# Altium PCB MCS17.PcbDoc (part 2 of 3)
Units mil, origin at the board's own origin, x right, y up, seen from the top; angles counter-clockwise.
Board outline 8500 x 5400 mil, 2 copper layers (Top Layer, Bottom Layer), stack 81.54 mil thick; 114 components, 70 nets, 364 pads, 106 vias.
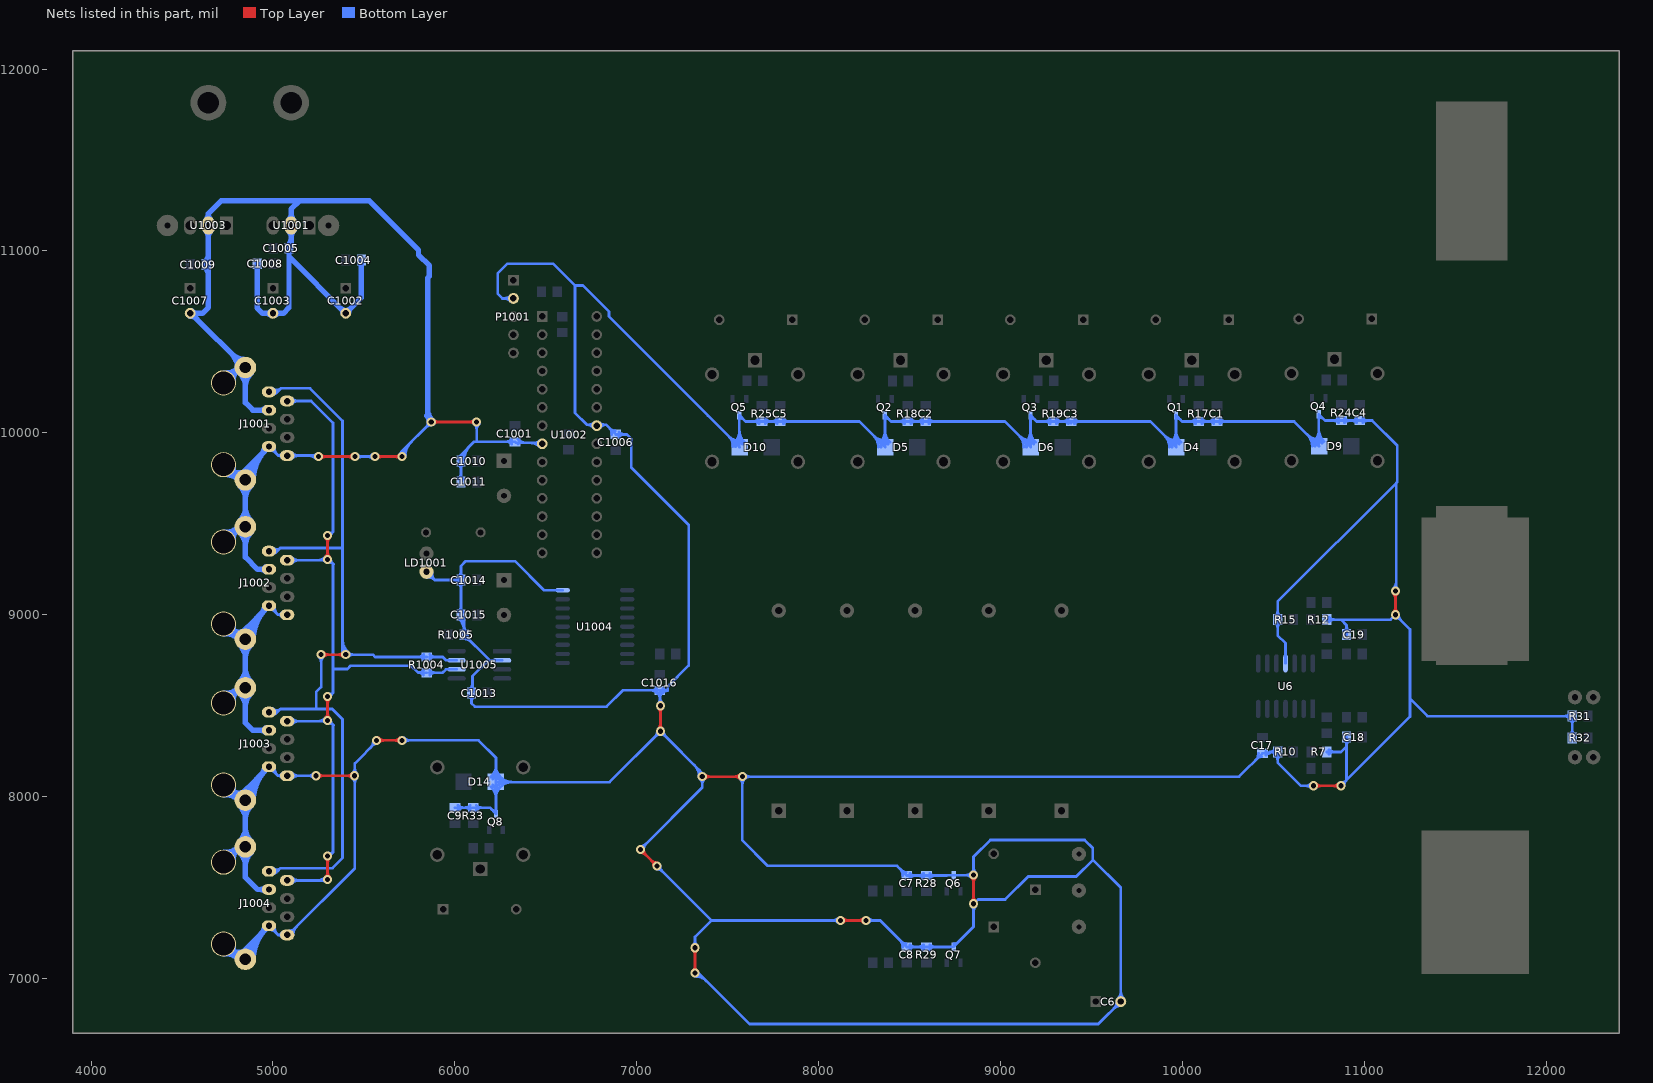
[diagram p2: the nets of this part, all layers, seen from the top]

## Via types
v1: diameter 50, hole 28, Top Layer to Bottom Layer, 85 vias
v2: diameter 196.85, hole 118.11, Top Layer to Bottom Layer, 12 vias
v3: diameter 157.48, hole 157.48, Top Layer to Bottom Layer, 7 vias
v4: diameter 137.8, hole 137.8, Top Layer to Bottom Layer, 2 vias

## Nets (pads, with @x,y where several pads share a name; then routed paths per layer and width w, separated by ;. In a path a pad name is that pad's centre, name@x,y a point inside that pad or via, vN(x,y) a via of type N, cw(c..) or ccw(c..) an arc to the next point about the centre after c; other vN are vias at no path point) (continued)
CAN_GND: C1.1 C2.1 C3.1 C4.1 C5.1 C6.2 C7.1 C8.1 C9.1 C17.1 C18.1 C19.1 C1001.2 C1002.2 C1003.2 C1004.1 C1005.1 C1006.1 C1007.2 C1008.1 C1009.1 C1010.1 C1011.1 C1013.2 C1014.1 C1015.1 C1016.2 D4.1 D5.1 D6.1 D9.1 D10.1 D14.1 J1001.3 J1001.7 J1001.8 J1001.S J1002.3 J1002.7 J1002.8 J1002.S J1003.3 J1003.7 J1003.8 J1003.S J1004.3 J1004.7 J1004.8 J1004.S LD1001.2 P1001.2 Q1.3 Q2.3 Q3.3 Q4.3 Q5.3 Q6.3 Q7.3 Q8.3 R7.2 R10.2 R12.2 R15.2 R17.1 R18.1 R19.1 R24.1 R25.1 R28.1 R29.1 R31.1 R32.1 R33.1 R1005.2 U6.11 U1001.2 U1002.8 U1002.22 U1003.2 U1004.9 U1005.2 | length 67693.4
  Top Layer w15: v1(5236.57,8115) v1(5449,8115) ; v1@5248.95,8102.63 cw(c5278.82,8072.75) 5278.82,8115 cw(c5278.82,8157.25) v1@5248.95,8127.37 ; v1(5250,9870) v1(5450,9870) ; v1@5262.37,9857.63 cw(c5292.25,9827.75) 5292.25,9870 cw(c5292.25,9912.25) v1@5262.37,9882.37 ; v1@5436.63,8102.63 ccw(c5406.75,8072.75) 5406.75,8115 ccw(c5406.75,8157.25) v1@5436.63,8127.37 ; v1@5437.63,9857.63 ccw(c5407.75,9827.75) 5407.75,9870 ccw(c5407.75,9912.25) v1@5437.63,9882.37 ; v1(5560,9870) v1(5710,9870) ; v1(5570,8310) v1(5710,8310) ; v1@5572.37,9857.63 cw(c5602.25,9827.75) 5602.25,9870 cw(c5602.25,9912.25) v1@5572.37,9882.37 ; v1@5582.37,8297.63 cw(c5612.25,8267.75) 5612.25,8310 cw(c5612.25,8352.25) v1@5582.37,8322.37 ; v1@5697.63,8297.63 ccw(c5667.75,8267.75) 5667.75,8310 ccw(c5667.75,8352.25) v1@5697.63,8322.37 ; v1@5697.63,9857.63 ccw(c5667.75,9827.75) 5667.75,9870 ccw(c5667.75,9912.25) v1@5697.63,9882.37 ; v1(5870,10060) v1(6120,10060) ; v1@5882.37,10047.63 cw(c5912.25,10017.75) 5912.25,10060 cw(c5912.25,10102.25) v1@5882.37,10072.37 ; v1@6107.63,10047.63 ccw(c6077.75,10017.75) 6077.75,10060 ccw(c6077.75,10102.25) v1@6107.63,10072.37 ; v1@7020,7692.5 cw(c7020,7650.25) 7049.87,7680.13 cw(c7079.75,7710) v1@7037.5,7710 ; v1(7020,7710) v1(7110,7620) ; v1@7092.5,7620 ccw(c7050.25,7620) 7080.13,7649.87 ccw(c7110,7679.75) v1@7110,7637.5 ; v1@7117.63,8372.37 ccw(c7087.75,8402.25) 7130,8402.25 ccw(c7172.25,8402.25) v1@7142.37,8372.37 ; v1@7117.63,8487.63 cw(c7087.75,8457.75) 7130,8457.75 cw(c7172.25,8457.75) v1@7142.37,8487.63 ; v1(7130,8360) v1(7130,8500) ; v1@7307.63,7042.37 ccw(c7277.75,7072.25) 7320,7072.25 ccw(c7362.25,7072.25) v1@7332.37,7042.37 ; v1@7307.63,7157.63 cw(c7277.75,7127.75) 7320,7127.75 cw(c7362.25,7127.75) v1@7332.37,7157.63 ; v1(7320,7030) v1(7320,7170) ; v1(7360,8110) v1(7580,8110) ; v1@7372.37,8097.63 cw(c7402.25,8067.75) 7402.25,8110 cw(c7402.25,8152.25) v1@7372.37,8122.37 ; v1@7567.63,8097.63 ccw(c7537.75,8067.75) 7537.75,8110 ccw(c7537.75,8152.25) v1@7567.63,8122.37 ; v1(8120,7320) v1(8260,7320) ; v1@8132.37,7307.63 cw(c8162.25,7277.75) 8162.25,7320 cw(c8162.25,7362.25) v1@8132.37,7332.37 ; v1@8247.63,7307.63 ccw(c8217.75,7277.75) 8217.75,7320 ccw(c8217.75,7362.25) v1@8247.63,7332.37 ; v1@8839.04,7423.79 ccw(c8809.17,7453.67) 8851.42,7453.67 ccw(c8893.67,7453.67) v1@8863.79,7423.79 ; v1@8839.04,7556.21 cw(c8809.17,7526.33) 8851.42,7526.33 cw(c8893.67,7526.33) v1@8863.79,7556.21 ; v1(8851.42,7411.42) v1(8851.42,7568.58) ; v1(10720,8060) v1(10870,8060) ; v1@10732.37,8047.63 cw(c10762.25,8017.75) 10762.25,8060 cw(c10762.25,8102.25) v1@10732.37,8072.37 ; v1@10857.63,8047.63 ccw(c10827.75,8017.75) 10827.75,8060 ccw(c10827.75,8102.25) v1@10857.63,8072.37 ; v1@11157.63,9012.37 ccw(c11127.75,9042.25) 11170,9042.25 ccw(c11212.25,9042.25) v1@11182.37,9012.37 ; v1@11157.63,9117.63 cw(c11127.75,9087.75) 11170,9087.75 cw(c11212.25,9087.75) v1@11182.37,9117.63 ; v1(11170,9000) v1(11170,9130)
  Bottom Layer w15: J1004.7@4978.43,7290 5028.43,7240 ; J1003.7@4978.43,8165 5028.43,8115 ; J1002.7@4978.43,9050 5028.43,9000 ; J1001.7@4978.43,9925 5028.43,9875 ; J1004.7@4988.27,7267.97 cw(c4988.27,7238.56) 5009.07,7259.36 ; J1003.7@4988.27,8142.97 cw(c4988.27,8113.56) 5009.07,8134.36 ; J1002.7@4988.27,9027.97 cw(c4988.27,8998.56) 5009.07,9019.36 ; J1001.7@4988.27,9902.97 cw(c4988.27,9873.56) 5009.07,9894.36 ; J1004.7@5010.02,7286.52 ccw(c5057.51,7278.93) 5023.5,7244.92 ; J1003.7@5010.02,8161.52 ccw(c5057.51,8153.93) 5023.5,8119.92 ; J1002.7@5010.02,9046.52 ccw(c5057.51,9038.93) 5023.5,9004.92 ; J1001.7@5010.02,9921.52 ccw(c5057.51,9913.93) 5023.5,9879.92 ; J1004.8@5050.01,7228.16 ccw(c5028.43,7214.41) 5028.43,7240 ; J1004.8@5050.01,7251.84 cw(c5028.43,7265.59) 5028.43,7240 ; J1003.8@5050.01,8103.16 ccw(c5028.43,8089.41) 5028.43,8115 ; J1003.8@5050.01,8126.84 cw(c5028.43,8140.59) 5028.43,8115 ; J1002.8@5050.01,8988.16 ccw(c5028.43,8974.41) 5028.43,9000 ; J1002.8@5050.01,9011.84 cw(c5028.43,9025.59) 5028.43,9000 ; J1001.8@5050.01,9863.16 ccw(c5028.43,9849.41) 5028.43,9875 ; J1001.8@5050.01,9886.84 cw(c5028.43,9900.59) 5028.43,9875 ; J1002.8@5078.43,9000 5028.43,9000 ; J1004.8@5088.27,7262.03 ccw(c5088.27,7303.43) 5117.54,7274.15 ; J1003.8@5103.84,8099.42 cw(c5141.45,8061.82) 5141.45,8115 cw(c5141.45,8168.18) J1003.8@5103.84,8130.58 ; J1001.8@5103.84,9859.42 cw(c5141.45,9821.82) 5141.45,9875 cw(c5141.45,9928.18) J1001.8@5103.84,9890.58 ; J1004.8@5110.3,7240 cw(c5175.25,7240) 5129.32,7285.93 ; 5195.68,9875 cw(c5195.68,9815.68) v1@5237.63,9857.63 ; 5219.82,9875 ccw(c5219.82,9900.18) v1@5237.63,9882.37 ; v1@5224.2,8102.63 ccw(c5194.33,8072.75) 5194.33,8115 ccw(c5194.33,8157.25) v1@5224.2,8127.37 ; v1@5240.57,8115 v1(5236.57,8115) J1003.8@5078.43,8115 5028.43,8115 ; v1(5250,9870) 5245,9875 J1001.8@5078.43,9875 5028.43,9875 ; v1@5436.63,8102.63 cw(c5404.34,8070.34) 5450,8070.34 ; v1@5436.63,8127.37 ccw(c5404.34,8159.66) 5450,8159.66 ; v1(5449,8115) v1@5450,8118.43 ; 5450,8075.17 cw(c5488.83,8075.17) v1@5461.37,8102.63 ; 5450,8154.83 ccw(c5488.83,8154.83) v1@5461.37,8127.37 ; v1(5450,9870) v1(5560,9870) ; v1@5462.37,9857.63 cw(c5492.25,9827.75) 5492.25,9870 cw(c5492.25,9912.25) v1@5462.37,9882.37 ; 5534.82,8267.32 ccw(c5492.14,8310) v1@5552.5,8310 ; v1@5547.63,9857.63 ccw(c5517.75,9827.75) 5517.75,9870 ccw(c5517.75,9912.25) v1@5547.63,9882.37 ; 5552.93,8285.43 cw(c5570,8268.36) v1@5570,8292.5 ; v1(5570,8310) 5570,8302.5 5450,8182.5 v1@5450,8118.43 ; v1@5697.5,9870 cw(c5739.75,9870) 5709.87,9899.87 ; v1@5701.39,9885.23 ccw(c5693.04,9900) 5710,9900 ; v1(5710,8310) 6130,8310 6226,8214 6226,8081.31 D14.1@6226,8079.89 ; v1(5710,9870) 5710,9900 ; v1@5712.5,9870 cw(c5790.96,9870) 5735.48,9925.48 ; v1@5718.61,9885.23 cw(c5726.96,9900) 5710,9900 ; v1@5722.37,8297.63 cw(c5752.25,8267.75) 5752.25,8310 cw(c5752.25,8352.25) v1@5722.37,8322.37 ; v1@5727.5,9870 cw(c5842.18,9870) 5761.09,9951.09 ; LD1001.2@5844,9237 5889.94,9191.06 ; LD1001.2@5848.03,9205.39 cw(c5854.39,9155.52) 5889.93,9191.07 ; v1@5852.5,10060 cw(c5810.25,10060) 5840.13,10030.13 cw(c5870,10000.25) v1@5870,10042.5 ; v1(5870,10060) 5710,9900 ; LD1001.2@5875.61,9232.97 ccw(c5925.48,9226.61) 5889.93,9191.07 ; C9.1@6001,7939.61 R33.1@6101,7939.61 6191.98,7939.61 Q8.3@6226,7905.6 D14.1@6226,8079.89 ; C9.1@6017.73,7926.82 cw(c6048.61,7895.94) 6048.61,7939.61 cw(c6048.61,7983.29) C9.1@6017.73,7952.41 ; C1015.1@6020.59,8982.21 cw(c5945.7,8907.32) R1005.2@6051.61,8907.32 ; C1015.1@6020.59,9015.67 ccw(c5989.71,9046.55) 6033.39,9046.55 ccw(c6077.06,9046.55) C1015.1@6046.18,9015.67 ; C1014.1@6020.59,9174.33 cw(c5989.71,9143.45) 6033.39,9143.45 cw(c6077.06,9143.45) C1014.1@6046.18,9174.33 ; C1014.1@6020.59,9178.27 ccw(c5989.71,9147.39) 5989.71,9191.06 ccw(c5989.71,9234.74) C1014.1@6020.59,9203.85 ; C1014.1@6020.59,9207.79 ccw(c5989.71,9238.67) 6033.39,9238.67 ccw(c6077.06,9238.67) C1014.1@6046.18,9207.79 ; C1011.1@6020.59,9746.73 ccw(c5989.71,9777.61) 6033.39,9777.61 ccw(c6077.06,9777.61) C1011.1@6046.18,9746.73 ; C1010.1@6020.59,9828.27 cw(c5989.71,9797.39) 6033.39,9797.39 cw(c6077.06,9797.39) C1010.1@6046.18,9828.27 ; C1010.1@6021.48,9848.94 cw(c6063.82,9848.94) 6033.88,9878.88 ; C1015.1@6031.2,8992.81 cw(c5981.92,8943.53) 6051.61,8943.53 ; C1011.1@6033.39,9730 C1010.1@6033.39,9845 6033.39,9878.39 6106.69,9951.69 6120,9951.69 ; C1010.1@6036.48,9848.94 cw(c6115.03,9848.94) 6059.49,9904.49 ; R1005.2@6038.82,8906.73 ccw(c6007.94,8937.61) 6051.61,8937.61 ccw(c6095.29,8937.61) R1005.2@6064.41,8906.73 ; C1010.1@6051.48,9848.94 cw(c6166.25,9848.94) 6085.09,9930.09 ; R1005.2@6051.61,8867.97 cw(c6051.61,8814.79) 6089.22,8852.4 ; R1005.2@6069.7,8886.06 ccw(c6103.87,8886.06) 6079.71,8861.9 ; C1013.2@6078.9,8553.27 cw(c6048.02,8522.39) 6091.69,8522.39 cw(c6135.37,8522.39) C1013.2@6104.48,8553.27 ; C1013.2@6078.9,8586.73 ccw(c6034,8631.63) 6097.5,8631.63 ; R33.1@6084.27,7926.82 ccw(c6053.39,7895.94) 6053.39,7939.61 ccw(c6053.39,7983.29) R33.1@6084.27,7952.41 ; C1013.2@6091.69,8570 6091.69,8513.31 6110,8495 6833.64,8495 6923.64,8585 C1016.2@7126.69,8585 ; C1013.2@6097.5,8575.81 6097.5,8662.5 6185,8750 ; 6097.5,8603.59 ccw(c6121.35,8603.59) C1013.2@6104.48,8586.73 ; v1@6107.63,10047.63 cw(c6077.75,10017.75) 6120,10017.75 cw(c6162.25,10017.75) v1@6132.37,10047.63 ; R33.1@6117.73,7926.82 cw(c6148.61,7895.94) 6148.61,7939.61 cw(c6148.61,7983.29) R33.1@6117.73,7952.41 ; v1(6120,10060) 6120,9951.69 ; D14.1@6197.87,8054.6 cw(c6129.96,7986.69) 6226,7986.69 ; D14.1@6197.87,8108.02 ccw(c6129.96,8175.93) 6226,8175.93 ; 6200.16,7931.44 ccw(c6226,7957.28) Q8.3@6226,7920.74 ; D14.1@6208.48,8065.2 cw(c6166.18,8022.9) 6226,8022.9 ; D14.1@6208.48,8097.41 ccw(c6166.18,8139.71) 6226,8139.71 ; 6226,7993.53 cw(c6312.36,7993.53) 6251.29,8054.6 cw(c6312.36,7993.53) 6312.36,8079.89 ; 6226,8029.74 cw(c6276.15,8029.74) 6240.69,8065.2 cw(c6276.15,8029.74) 6276.15,8079.89 ; 6226,8132.87 ccw(c6276.15,8132.87) 6240.69,8097.41 ccw(c6282.99,8139.71) 6282.99,8079.89 ; 6226,8169.08 ccw(c6312.36,8169.08) 6251.29,8108.02 ccw(c6319.2,8175.93) 6319.2,8079.89 ; U1005.2@6260,8750 6185,8750 ; P1001.2@6306.42,10723.42 ccw(c6268.82,10685.82) 6268.82,10739 ccw(c6268.82,10792.18) P1001.2@6306.42,10754.58 ; C1001.2@6313.27,9938.9 ccw(c6282.39,9908.02) 6282.39,9951.69 ccw(c6282.39,9995.37) C1001.2@6313.27,9964.48 ; P1001.2@6322,10739 6261,10739 6235,10765 6235,10876.8 6288.2,10930 6540,10930 6660,10810 ; C1001.2@6346.73,9938.9 cw(c6361.45,9924.18) 6361.45,9945 ; C1001.2@6346.73,9964.48 ccw(c6393.77,10011.53) 6393.77,9945 ; 6414.75,9945 cw(c6414.75,9874.75) U1002.8@6464.42,9924.42 ; 6438.89,9945 ccw(c6438.89,9981.11) U1002.8@6464.42,9955.58 ; U1002.8@6470,9945 6336.69,9945 C1001.2@6330,9951.69 6120,9951.69 ; U1004.9@6592.83,9135 6490,9135 6330,9295 6060,9295 6033.39,9268.39 C1014.1@6033.39,9191.06 ; 6738.89,10045 ccw(c6738.89,10081.11) U1002.22@6764.42,10055.58 ; U1002.22@6762.56,10026.54 ccw(c6725,9997.56) 6725,10045 ; U1002.22@6795.58,10055.58 ccw(c6821.11,10081.11) 6821.11,10045 ; U1002.22@6798.11,10027.45 cw(c6831.61,10004.23) 6831.61,10045 ; 6847.4,10029.22 cw(c6809.79,9991.61) C1006.1@6862.97,9991.61 ; 6856.9,10019.71 ccw(c6881.06,10043.87) C1006.1@6881.06,10009.7 ; C1006.1@6901.73,9978.82 cw(c6932.61,9947.94) 6932.61,9991.61 cw(c6932.61,10035.29) C1006.1@6901.73,10004.41 ; v1(7020,7710) 7360,8050 v1(7360,8110) 7370,8120 v1(7130,8360) 6849.89,8079.89 D14.1@6226,8079.89 ; v1@7020,7727.5 ccw(c7020,7769.75) 7049.87,7739.87 ccw(c7079.75,7710) v1@7037.5,7710 ; 7075.18,8585 cw(c7075.18,8535.81) C1016.2@7109.96,8570.59 ; 7082.98,8585 ccw(c7082.98,8623.16) C1016.2@7109.96,8596.18 ; v1@7110,7602.5 cw(c7110,7560.25) 7139.87,7590.13 cw(c7169.75,7620) v1@7127.5,7620 ; v1(7110,7620) 7410,7320 ; v1@7112.5,8360 cw(c7070.25,8360) 7100.13,8330.13 cw(c7130,8300.25) 7130,8342.5 cw(c7130,8300.25) 7159.87,8330.13 cw(c7189.75,8360) v1@7147.5,8360 ; C1016.2@7113.9,8570.59 cw(c7083.02,8539.71) 7126.69,8539.71 cw(c7170.37,8539.71) C1016.2@7139.48,8570.59 ; v1@7117.63,8512.37 ccw(c7095.74,8534.26) 7126.69,8534.26 ; 7126.69,8550.23 ccw(c7180.23,8550.23) v1@7142.37,8512.37 ; v1(7130,8500) 7130,8489.11 7126.69,8485.81 7126.69,8500 C1016.2@7126.69,8583.39 7170,8583.39 ; C1016.2@7144.36,8571.6 cw(c7170,8549.6) 7170,8583.39 ; C1016.2@7144.36,8595.17 ccw(c7170,8617.18) 7170,8583.39 ; v1@7307.63,7182.37 ccw(c7277.75,7212.25) 7320,7212.25 ccw(c7362.25,7212.25) v1@7332.37,7182.37 ; 7315.98,8174.02 cw(c7251.97,8110) v1@7342.5,8110 ; v1@7320,7012.5 cw(c7320,6921.97) 7384.02,6985.98 ; v1@7320,7027.5 cw(c7320,6973.18) 7358.41,7011.59 ; v1(7320,7030) 7330,7040 7620,6750 9536.59,6750 C6.2@9660.59,6874 9660.59,7499.44 9506.87,7653.16 ; v1(7320,7170) 7320,7230 7410,7320 ; 7341.59,8148.41 cw(c7303.18,8110) v1@7357.5,8110 ; v1@7347.63,8097.63 cw(c7317.75,8067.75) 7360,8067.75 cw(c7402.25,8067.75) v1@7372.37,8097.63 ; D10.1@7527.68,9925.63 ccw(c7466.33,9932.78) 7510,9976.45 ; D10.1@7538.49,9947.97 ccw(c7477.42,10009.04) 7563.78,10009.04 ; D10.1@7542.57,9923.9 ccw(c7505.59,9928.21) 7531.92,9954.54 ccw(c7558.25,9980.87) D10.1@7562.56,9943.88 ; D10.1@7549.09,9937.36 ccw(c7513.63,9972.82) 7563.78,9972.82 ; D10.1@7560.82,9958.78 cw(c7553.67,10020.12) 7510,9976.45 ; 7563.78,9979.67 ccw(c7623.6,9979.67) D10.1@7581.3,9937.36 ; 7563.78,10015.88 ccw(c7659.82,10015.88) D10.1@7591.91,9947.97 ; Q5.3@7563.78,10081.83 cw(c7563.78,10045.28) 7589.62,10071.13 ; D10.1@7565.2,9921.26 D10.1@7563.78,9922.68 ; v1@7567.63,8097.63 cw(c7537.75,8067.75) 7580,8067.75 cw(c7622.25,8067.75) 7592.37,8097.63 cw(c7622.25,8067.75) 7622.25,8110 cw(c7622.25,8152.25) v1@7592.37,8122.37 ; R25.1@7672.05,10050.16 ccw(c7641.17,10019.28) 7641.17,10062.95 ccw(c7641.17,10106.63) R25.1@7672.05,10075.74 ; R25.1@7705.51,10050.16 cw(c7736.39,10019.28) 7736.39,10062.95 cw(c7736.39,10106.63) R25.1@7705.51,10075.74 ; C5.1@7772.05,10050.16 ccw(c7741.17,10019.28) 7741.17,10062.95 ccw(c7741.17,10106.63) C5.1@7772.05,10075.74 ; C5.1@7805.51,10050.16 cw(c7836.39,10019.28) 7836.39,10062.95 cw(c7836.39,10106.63) C5.1@7805.51,10075.74 ; v1@8107.63,7307.63 ccw(c8077.75,7277.75) 8077.75,7320 ccw(c8077.75,7362.25) v1@8107.63,7332.37 ; v1(8120,7320) 7410,7320 ; v1(8260,7320) 8338.2,7320 C8.1@8484,7174.2 R29.1@8593,7174.2 8720.91,7174.2 8722,7175.29 Q7.3@8741.6,7175.29 8851.42,7285.11 v1(8851.42,7411.42) 8875,7435 9025.12,7435 9151.99,7561.87 9415.58,7561.87 9506.87,7653.16 ; v1@8272.37,7307.63 cw(c8302.25,7277.75) 8302.25,7320 cw(c8302.25,7362.25) v1@8272.37,7332.37 ; D5.1@8327.42,9921.26 ccw(c8236.22,9921.26) 8300.71,9985.75 ccw(c8365.2,10050.23) D5.1@8365.2,9959.04 ; D5.1@8338.49,9947.97 ccw(c8277.42,10009.04) 8363.78,10009.04 ; D5.1@8342.42,9921.26 ccw(c8287.44,9921.26) 8326.32,9960.14 ccw(c8365.2,9999.02) D5.1@8365.2,9944.04 ; D5.1@8349.09,9937.36 ccw(c8313.63,9972.82) 8363.78,9972.82 ; 8363.78,9979.67 ccw(c8423.6,9979.67) D5.1@8381.3,9937.36 ; 8363.78,10015.88 ccw(c8459.82,10015.88) D5.1@8391.91,9947.97 ; Q2.3@8363.78,10081.83 cw(c8363.78,10045.28) 8389.62,10071.13 ; D5.1@8365.2,9921.26 D5.1@8363.78,9922.68 ; 8446.4,7211.81 cw(c8408.79,7174.2) C8.1@8461.97,7174.2 ; 8446.4,7604.36 cw(c8408.79,7566.76) C7.1@8461.97,7566.76 ; 8455.9,7202.3 ccw(c8480.06,7226.46) C8.1@8480.06,7192.3 ; 8455.9,7594.85 ccw(c8480.06,7619.02) C7.1@8480.06,7584.85 ; R18.1@8472.05,10050.16 ccw(c8441.17,10019.28) 8441.17,10062.95 ccw(c8441.17,10106.63) R18.1@8472.05,10075.74 ; C8.1@8500.73,7161.41 cw(c8531.61,7130.53) 8531.61,7174.2 cw(c8531.61,7217.88) C8.1@8500.73,7187 ; C7.1@8500.73,7553.96 cw(c8531.61,7523.08) 8531.61,7566.76 cw(c8531.61,7610.43) C7.1@8500.73,7579.55 ; R18.1@8505.51,10050.16 cw(c8536.39,10019.28) 8536.39,10062.95 cw(c8536.39,10106.63) R18.1@8505.51,10075.74 ; C2.1@8572.05,10050.16 ccw(c8541.17,10019.28) 8541.17,10062.95 ccw(c8541.17,10106.63) C2.1@8572.05,10075.74 ; R29.1@8576.27,7161.41 ccw(c8545.39,7130.53) 8545.39,7174.2 ccw(c8545.39,7217.88) R29.1@8576.27,7187 ; R28.1@8576.27,7553.96 ccw(c8545.39,7523.08) 8545.39,7566.76 ccw(c8545.39,7610.43) R28.1@8576.27,7579.55 ; C2.1@8605.51,10050.16 cw(c8636.39,10019.28) 8636.39,10062.95 cw(c8636.39,10106.63) C2.1@8605.51,10075.74 ; R29.1@8609.73,7161.41 cw(c8640.61,7130.53) 8640.61,7174.2 cw(c8640.61,7217.88) R29.1@8609.73,7187 ; R28.1@8609.73,7553.96 cw(c8640.61,7523.08) 8640.61,7566.76 cw(c8640.61,7610.43) R28.1@8609.73,7579.55 ; Q7.3@8741.6,7190.43 ccw(c8741.6,7226.98) 8767.44,7201.13 ; v1@8839.04,7399.04 cw(c8809.17,7369.17) 8851.42,7369.17 cw(c8893.67,7369.17) v1@8863.79,7399.04 ; v1@8839.04,7556.21 ccw(c8809.17,7526.33) 8809.17,7568.58 ccw(c8809.17,7610.83) 8839.04,7580.96 ccw(c8809.17,7610.83) 8851.42,7610.83 ccw(c8893.67,7610.83) v1@8863.79,7580.96 ; D6.1@9127.42,9921.26 ccw(c9036.22,9921.26) 9100.71,9985.75 ccw(c9165.2,10050.23) D6.1@9165.2,9959.04 ; D6.1@9138.49,9947.97 ccw(c9077.42,10009.04) 9163.78,10009.04 ; D6.1@9142.42,9921.26 ccw(c9087.44,9921.26) 9126.32,9960.14 ccw(c9165.2,9999.02) D6.1@9165.2,9944.04 ; D6.1@9149.09,9937.36 ccw(c9113.63,9972.82) 9163.78,9972.82 ; 9163.78,9979.67 ccw(c9223.6,9979.67) D6.1@9181.3,9937.36 ; 9163.78,10015.88 ccw(c9259.82,10015.88) D6.1@9191.91,9947.97 ; Q3.3@9163.78,10081.83 cw(c9163.78,10045.28) 9189.62,10071.13 ; D6.1@9165.2,9921.26 D6.1@9163.78,9922.68 ; R19.1@9272.05,10050.16 ccw(c9241.17,10019.28) 9241.17,10062.95 ccw(c9241.17,10106.63) R19.1@9272.05,10075.74 ; R19.1@9305.51,10050.16 cw(c9336.39,10019.28) 9336.39,10062.95 cw(c9336.39,10106.63) R19.1@9305.51,10075.74 ; C3.1@9372.05,10050.16 ccw(c9341.17,10019.28) 9341.17,10062.95 ccw(c9341.17,10106.63) C3.1@9372.05,10075.74 ; C3.1@9380,10053.39 C3.1@9388.78,10053.39 ; C3.1@9405.51,10050.16 cw(c9436.39,10019.28) 9436.39,10062.95 cw(c9436.39,10106.63) C3.1@9405.51,10075.74 ; C6.2@9638.09,6874 cw(c9583.77,6874) 9622.18,6835.59 cw(c9660.59,6797.18) C6.2@9660.59,6851.5 ; C6.2@9644.68,6889.91 ccw(c9606.27,6928.32) 9660.59,6928.32 ccw(c9714.91,6928.32) C6.2@9676.5,6889.91 ; D4.1@9927.42,9921.26 ccw(c9836.22,9921.26) 9900.71,9985.75 ccw(c9965.2,10050.23) D4.1@9965.2,9959.04 ; D4.1@9938.49,9947.97 ccw(c9877.42,10009.04) 9963.78,10009.04 ; D4.1@9942.42,9921.26 ccw(c9887.44,9921.26) 9926.32,9960.14 ccw(c9965.2,9999.02) D4.1@9965.2,9944.04 ; D4.1@9949.09,9937.36 ccw(c9913.63,9972.82) 9963.78,9972.82 ; 9963.78,9979.67 ccw(c10023.6,9979.67) D4.1@9981.3,9937.36 ; 9963.78,10015.88 ccw(c10059.82,10015.88) D4.1@9991.91,9947.97 ; Q1.3@9963.78,10081.83 cw(c9963.78,10045.28) 9989.62,10071.13 ; D4.1@9965.2,9921.26 D4.1@9963.78,9922.68 ; R17.1@10072.05,10050.16 ccw(c10041.17,10019.28) 10041.17,10062.95 ccw(c10041.17,10106.63) R17.1@10072.05,10075.74 ; R17.1@10105.51,10050.16 cw(c10136.39,10019.28) 10136.39,10062.95 cw(c10136.39,10106.63) R17.1@10105.51,10075.74 ; C1.1@10172.05,10050.16 ccw(c10141.17,10019.28) 10141.17,10062.95 ccw(c10141.17,10106.63) C1.1@10172.05,10075.74 ; C1.1@10205.51,10050.16 cw(c10236.39,10019.28) 10236.39,10062.95 cw(c10236.39,10106.63) C1.1@10205.51,10075.74 ; 10401.4,8200.78 ccw(c10363.79,8238.39) C17.1@10416.97,8238.39 ; 10410.9,8210.29 cw(c10435.06,8186.13) C17.1@10435.06,8220.3 ; C17.1@10457.2,8227.26 cw(c10480,8209.47) 10480,8238.39 ; C17.1@10457.2,8249.51 ccw(c10480,8267.3) 10480,8238.39 ; R10.2@10509.7,8233.42 ccw(c10480,8204.67) 10480,8246 ; R10.2@10509.7,8258.58 cw(c10480,8287.33) 10480,8246 ; R10.2@10509.9,8229.27 cw(c10479.02,8198.39) 10522.69,8198.39 cw(c10566.37,8198.39) R10.2@10535.48,8229.27 ; R15.2@10509.9,8957.27 cw(c10479.02,8926.39) 10522.69,8926.39 cw(c10566.37,8926.39) R15.2@10535.48,8957.27 ; R15.2@10509.9,8990.73 ccw(c10479.02,9021.61) 10522.69,9021.61 ccw(c10566.37,9021.61) R15.2@10535.48,8990.73 ; U6.11@10566,8733 10566,8844 10522.69,8887.31 R15.2@10522.69,8974 10522.69,9072.69 11175,9725 ; v1@10707.63,8047.63 ccw(c10677.75,8017.75) 10677.75,8060 ccw(c10677.75,8102.25) v1@10707.63,8072.37 ; D9.1@10712.42,9926.26 ccw(c10621.22,9926.26) 10685.71,9990.75 ccw(c10750.2,10055.23) D9.1@10750.2,9964.04 ; v1(10720,8060) 10650,8060 10522.69,8187.31 R10.2@10522.69,8246 10480,8246 ; D9.1@10723.49,9952.97 ccw(c10662.42,10014.04) 10748.78,10014.04 ; D9.1@10727.42,9926.26 ccw(c10672.44,9926.26) 10711.32,9965.14 ccw(c10750.2,10004.02) D9.1@10750.2,9949.04 ; D9.1@10734.09,9942.36 ccw(c10698.63,9977.82) 10748.78,9977.82 ; 10748.78,9984.67 ccw(c10808.6,9984.67) D9.1@10766.3,9942.36 ; 10748.78,10020.88 ccw(c10844.82,10020.88) D9.1@10776.91,9952.97 ; Q4.3@10748.78,10086.83 cw(c10748.78,10050.28) 10774.62,10076.13 ; D9.1@10750.2,9926.26 D9.1@10748.78,9927.68 ; R7.2@10792.31,8246 10871,8246 10901.69,8276.69 ; R12.2@10792.31,8973 10871,8973 ; R7.2@10805.1,8233.21 cw(c10835.98,8202.33) 10835.98,8246 cw(c10835.98,8289.67) R7.2@10805.1,8258.79 ; R12.2@10805.1,8961.21 cw(c10833.57,8932.74) 10833.57,8973 ; R12.2@10805.1,8986.79 ccw(c10838.4,9020.09) 10838.4,8973 ; R24.1@10857.05,10055.16 ccw(c10826.17,10024.28) 10826.17,10067.95 ccw(c10826.17,10111.63) R24.1@10857.05,10080.74 ; v1(10870,8060) 10901.69,8091.69 ; v1@10870,8077.5 ccw(c10870,8119.75) 10899.87,8089.87 ccw(c10929.75,8060) v1@10887.5,8060 ; C18.1@10888.9,8311.27 cw(c10858.02,8280.39) 10901.69,8280.39 cw(c10945.37,8280.39) C18.1@10914.48,8311.27 ; C19.1@10888.9,8907.73 ccw(c10858.02,8938.61) 10901.69,8938.61 ccw(c10945.37,8938.61) C19.1@10914.48,8907.73 ; R24.1@10890.51,10055.16 cw(c10921.39,10024.28) 10921.39,10067.95 cw(c10921.39,10111.63) R24.1@10890.51,10080.74 ; C18.1@10901.69,8328 10901.69,8276.69 ; C19.1@10901.69,8891 10901.69,8942.31 10871,8973 ; C4.1@10957.05,10055.16 ccw(c10926.17,10024.28) 10926.17,10067.95 ccw(c10926.17,10111.63) C4.1@10957.05,10080.74 ; C4.1@10990.51,10055.16 cw(c11021.39,10024.28) 11021.39,10067.95 cw(c11021.39,10111.63) C4.1@10990.51,10080.74 ; v1@11157.63,9142.37 ccw(c11115.68,9184.32) 11175,9184.32 ; v1@11170,8982.5 cw(c11170,8940.25) 11199.87,8970.13 cw(c11229.75,9000) v1@11187.5,9000 ; v1(11170,9130) 11175,9135 11175,9725 ; 11175,9160.18 ccw(c11200.18,9160.18) v1@11182.37,9142.37 ; R32.1@12129.42,8339.73 ccw(c12098.54,8370.61) 12142.21,8370.61 ccw(c12185.88,8370.61) R32.1@12155,8339.73 ; R31.1@12129.42,8426.27 cw(c12098.54,8395.39) 12142.21,8395.39 cw(c12185.88,8395.39) R31.1@12155,8426.27 ; R31.1@12129.42,8430.21 ccw(c12098.54,8399.33) 12098.54,8443 ccw(c12098.54,8486.67) R31.1@12129.42,8455.79 ; R32.1@12142.21,8323 R31.1@12142.21,8443 11347,8443 11250,8540 ; 5028.43,7240 J1004.8@5078.43,7240 5083.39,7240 5450,7606.61 5450,8101.57 5442.79,8108.79 5441.57,8110 5447.79,8116.21 v1@5450,8118.43 ; 5889.94,9191.06 C1014.1@6033.39,9191.06 ; C1014.1@6033.39,9191.06 C1015.1@6033.39,8998.94 6051.61,8980.71 R1005.2@6051.61,8890 6185,8756.61 6185,8750 ; 6660,10810 6660,10110 6725,10045 ; 6660,10810 6704.79,10810 6847.03,10667.76 6847.03,10639.43 7390.73,10095.73 7510,9976.46 ; 6725,10045 6780,10045 6831.61,10045 ; 6831.61,10045 C1006.1@6885,9991.61 6945.39,9991.61 6969,9968 6969,9811 7285,9495 7285,8720.16 7170,8605.16 7170,8583.39 ; 7510,9976.46 D10.1@7563.78,9922.68 ; D10.1@7563.78,9922.68 Q5.3@7563.78,10096.97 7597.8,10062.95 R25.1@7688.78,10062.95 C5.1@7788.78,10062.95 8223.5,10062.95 D5.1@8363.78,9922.68 ; D5.1@8363.78,9922.68 Q2.3@8363.78,10096.97 8397.8,10062.95 R18.1@8488.78,10062.95 C2.1@8588.78,10062.95 9023.5,10062.95 D6.1@9163.78,9922.68 ; D6.1@9163.78,9922.68 Q3.3@9163.78,10096.97 9197.8,10062.95 R19.1@9288.78,10062.95 C3.1@9388.78,10062.95 9823.5,10062.95 D4.1@9963.78,9922.68 ; 9506.87,7653.16 9506.87,7716.84 9461.84,7761.87 8943.29,7761.87 8851.42,7670 v1(8851.42,7568.58) Q6.3@8741.6,7568.58 8707.58,7568.58 8705.76,7566.76 R28.1@8593,7566.76 C7.1@8484,7566.76 8430.76,7620 7720,7620 7580,7760 v1(7580,8110) 10310.61,8110 C17.1@10439,8238.39 10480,8238.39 ; D4.1@9963.78,9922.68 Q1.3@9963.78,10096.97 9997.8,10062.95 R17.1@10088.78,10062.95 C1.1@10188.78,10062.95 10613.5,10062.95 D9.1@10748.78,9927.68 ; 10480,8238.39 10480,8246 ; D9.1@10748.78,9927.68 Q4.3@10748.78,10101.97 10782.8,10067.95 R24.1@10873.78,10067.95 C4.1@10973.78,10067.95 11042.05,10067.95 11180,9930 11180,9730 11175,9725 ; 10871,8973 11143,8973 v1(11170,9000) 11250,8920 11250,8540 ; 10901.69,8091.69 11250,8440 11250,8540 ; 10901.69,8091.69 10901.69,8276.69
  Bottom Layer w30: C1007.2@4545,10642.2 cw(c4545,10592.59) 4580.08,10627.67 ; C1007.2@4545,10657.2 C1007.2@4550.55,10657.2 ; C1007.2@4555.61,10646.6 cw(c4581.21,10620.99) 4581.21,10657.2 cw(c4581.21,10693.42) C1007.2@4555.61,10667.81 ; C1009.1@4624.13,10913.57 cw(c4573.73,10863.18) 4645,10863.18 ; C1009.1@4624.13,10936.43 ccw(c4573.73,10986.82) 4645,10986.82 ; U1003.2@4630.86,11110.86 cw(c4596.72,11076.72) 4645,11076.72 cw(c4693.28,11076.72) U1003.2@4659.14,11110.86 ; U1003.2@4630.86,11169.14 ccw(c4596.72,11203.28) 4645,11203.28 ccw(c4693.28,11203.28) U1003.2@4659.14,11169.14 ; C1009.1@4636.61,10930 C1009.1@4645,10930 ; J1004.S@4728.43,7190 J1004.S@4812.28,7106.14 ; J1004.S@4728.43,7640 4812.68,7724.25 J1004.S@4848.5,7724.25 ; J1003.S@4728.43,8065 J1003.S@4812.28,7981.14 ; J1003.S@4728.43,8515 4812.68,8599.25 J1003.S@4848.5,8599.25 ; J1002.S@4728.43,8950 J1002.S@4812.28,8866.14 ; J1002.S@4728.43,9400 4812.68,9484.25 J1002.S@4848.5,9484.25 ; J1001.S@4728.43,9825 J1001.S@4812.28,9741.14 ; J1001.S@4728.43,10275 4812.68,10359.25 J1001.S@4848.5,10359.25 ; J1004.S@4731.89,7693.79 ccw(c4738.61,7798.31) 4812.67,7724.25 ccw(c4886.74,7650.18) J1004.S@4782.21,7643.46 ; J1003.S@4731.89,8568.79 ccw(c4738.61,8673.31) 4812.67,8599.25 ccw(c4886.74,8525.18) J1003.S@4782.21,8518.46 ; J1002.S@4731.89,9453.79 ccw(c4738.61,9558.31) 4812.67,9484.25 ccw(c4886.74,9410.18) J1002.S@4782.21,9403.46 ; J1001.S@4731.89,10328.79 ccw(c4738.61,10433.31) 4812.67,10359.25 ccw(c4886.74,10285.18) J1001.S@4782.21,10278.46 ; J1004.S@4732.08,7136.23 cw(c4739.08,7032.95) J1004.S@4812.28,7106.15 ; J1003.S@4732.08,8011.23 cw(c4739.08,7907.95) J1003.S@4812.28,7981.15 ; J1002.S@4732.08,8896.23 cw(c4739.08,8792.95) J1002.S@4812.28,8866.15 ; J1001.S@4732.08,9771.23 cw(c4739.08,9667.95) J1001.S@4812.28,9741.15 ; J1004.S@4746.54,7171.89 ccw(c4811.39,7236.74) J1004.S@4836.46,7148.52 ; J1003.S@4746.54,8046.89 ccw(c4811.39,8111.74) J1003.S@4836.46,8023.52 ; J1002.S@4746.54,8931.89 ccw(c4811.39,8996.74) J1002.S@4836.46,8908.52 ; J1001.S@4746.54,9806.89 ccw(c4811.39,9871.74) J1001.S@4836.46,9783.52 ; J1004.S@4763.35,7674.93 cw(c4848.5,7589.77) J1004.S@4848.5,7710.2 ; J1003.S@4763.35,8549.93 cw(c4848.5,8464.77) J1003.S@4848.5,8585.2 ; J1002.S@4763.35,9434.93 cw(c4848.5,9349.77) J1002.S@4848.5,9470.2 ; J1001.S@4763.35,10309.93 cw(c4848.5,10224.77) J1001.S@4848.5,10345.2 ; J1004.S@4782.2,7186.35 ccw(c4885.47,7179.34) J1004.S@4812.28,7106.15 ; J1003.S@4782.2,8061.35 ccw(c4885.47,8054.34) J1003.S@4812.28,7981.15 ; J1002.S@4782.2,8946.35 ccw(c4885.47,8939.34) J1002.S@4812.28,8866.15 ; J1001.S@4782.2,9821.35 ccw(c4885.47,9814.34) J1001.S@4812.28,9741.15 ; 4782.65,7135.78 ccw(c4827.37,7180.5) J1004.S@4844.66,7119.66 ; 4782.65,8010.78 ccw(c4827.37,8055.5) J1003.S@4844.66,7994.66 ; 4782.65,8895.78 ccw(c4827.37,8940.5) J1002.S@4844.66,8879.66 ; 4782.65,9770.78 ccw(c4827.37,9815.5) J1001.S@4844.66,9754.66 ; J1001.S@4804.45,10359.25 ccw(c4698.09,10359.25) 4773.3,10434.46 ccw(c4848.5,10509.67) J1001.S@4848.5,10403.31 ; J1004.S@4817.35,7693.1 cw(c4742.15,7617.89) 4848.5,7617.89 cw(c4954.86,7617.89) J1004.S@4879.66,7693.1 ; J1004.S@4817.35,7755.4 ccw(c4742.15,7830.61) 4848.5,7830.61 ccw(c4954.86,7830.61) J1004.S@4879.66,7755.4 ; J1003.S@4817.35,7949.99 cw(c4742.15,7874.78) 4848.5,7874.78 cw(c4954.86,7874.78) J1003.S@4879.66,7949.99 ; J1003.S@4817.35,8568.1 cw(c4742.15,8492.89) 4848.5,8492.89 cw(c4954.86,8492.89) J1003.S@4879.66,8568.1 ; J1003.S@4817.35,8630.4 ccw(c4742.15,8705.61) 4848.5,8705.61 ccw(c4954.86,8705.61) J1003.S@4879.66,8630.4 ; J1002.S@4817.35,8834.99 cw(c4742.15,8759.78) 4848.5,8759.78 cw(c4954.86,8759.78) J1002.S@4879.66,8834.99 ; J1002.S@4817.35,9453.1 cw(c4742.15,9377.89) 4848.5,9377.89 cw(c4954.86,9377.89) J1002.S@4879.66,9453.1 ; J1002.S@4817.35,9515.4 ccw(c4742.15,9590.61) 4848.5,9590.61 ccw(c4954.86,9590.61) J1002.S@4879.66,9515.4 ; J1001.S@4817.35,9709.99 cw(c4742.15,9634.78) 4848.5,9634.78 cw(c4954.86,9634.78) J1001.S@4879.66,9709.99 ; J1001.S@4817.35,10328.1 cw(c4742.15,10252.89) 4848.5,10252.89 cw(c4954.86,10252.89) J1001.S@4879.66,10328.1 ; J1004.S@4832.56,7106.14 cw(c4924.28,7106.14) 4859.42,7171 ; J1003.S@4832.56,7981.14 cw(c4924.28,7981.14) 4859.42,8046 ; J1002.S@4832.56,8866.14 cw(c4924.28,8866.14) 4859.42,8931 ; J1001.S@4832.56,9741.14 cw(c4924.28,9741.14) 4859.42,9806 ; J1004.S@4862.56,7106.14 cw(c5026.71,7106.14) 4910.64,7222.21 ; J1003.S@4862.56,7981.14 cw(c5026.71,7981.14) 4910.64,8097.21 ; J1002.S@4862.56,8866.14 cw(c5026.71,8866.14) 4910.64,8982.21 ; J1001.S@4862.56,9741.14 cw(c5026.71,9741.14) 4910.64,9857.21 ; J1004.S@4892.56,7106.14 cw(c5129.13,7106.14) J1004.7@4961.85,7273.42 ; J1003.S@4892.56,7981.14 cw(c5129.13,7981.14) J1003.7@4961.85,8148.42 ; J1002.S@4892.56,8866.14 cw(c5129.13,8866.14) J1002.7@4961.85,9033.42 ; J1001.S@4892.56,9741.14 cw(c5129.13,9741.14) J1001.7@4961.85,9908.42 ; C1008.1@4913.39,10930 4913.39,10686.61 4942.8,10657.2 C1003.2@5000,10657.2 5057.2,10657.2 5088.31,10688.31 5088.31,10968.9 ; 4936.82,7248.4 ccw(c4895.22,7290) J1004.7@4954.06,7290 ; 4936.82,8123.4 ccw(c4895.22,8165) J1003.7@4954.06,8165 ; 4936.82,9008.4 ccw(c4895.22,9050) J1002.7@4954.06,9050 ; 4936.82,9883.4 ccw(c4895.22,9925) J1001.7@4954.06,9925 ; J1004.3@4958.31,7479.73 ccw(c4933.51,7454.93) 4933.51,7490 ccw(c4933.51,7525.07) J1004.3@4958.31,7500.27 ; J1003.3@4958.31,8354.73 ccw(c4933.51,8329.93) 4933.51,8365 ccw(c4933.51,8400.07) J1003.3@4958.31,8375.27 ; J1002.3@4958.31,9239.73 ccw(c4933.51,9214.93) 4933.51,9250 ccw(c4933.51,9285.07) J1002.3@4958.31,9260.27 ; J1001.3@4958.31,10114.73 ccw(c4933.51,10089.93) 4933.51,10125 ccw(c4933.51,10160.07) J1001.3@4958.31,10135.27 ; J1004.7@4978.43,7290 4848.5,7160.08 J1004.S@4848.5,7106.14 J1004.S@4812.28,7106.14 ; J1004.3@4978.43,7490 4915,7490 4848.5,7556.5 J1004.S@4848.5,7724.25 ; J1003.7@4978.43,8165 4848.5,8035.08 J1003.S@4848.5,7981.14 ; J1003.3@4978.43,8365 4890,8365 4848.5,8406.5 J1003.S@4848.5,8599.25 ; J1002.7@4978.43,9050 4848.5,8920.08 J1002.S@4848.5,8866.14 ; J1002.3@4978.43,9250 4915,9250 4848.5,9316.5 J1002.S@4848.5,9484.25 ; J1001.7@4978.43,9925 4848.5,9795.08 J1001.S@4848.5,9741.14 ; J1001.3@4978.43,10125 4890,10125 4848.5,10166.5 J1001.S@4848.5,10359.25 ; C1003.2@4989.39,10646.6 ccw(c4963.79,10620.99) 4963.79,10657.2 ccw(c4963.79,10693.42) C1003.2@4989.39,10667.81 ; C1003.2@5010.61,10646.6 cw(c5036.21,10620.99) 5036.21,10657.2 cw(c5036.21,10693.42) C1003.2@5010.61,10667.81 ; C1005.1@5080.82,11026.43 ccw(c5034.51,11072.73) 5100,11072.73 ; U1001.2@5085.86,11110.86 cw(c5051.72,11076.72) 5100,11076.72 cw(c5148.28,11076.72) U1001.2@5114.14,11110.86 ; U1001.2@5085.86,11169.14 ccw(c5051.72,11203.28) 5100,11203.28 ccw(c5148.28,11203.28) U1001.2@5114.14,11169.14 ; C1002.2@5385,10657.2 ccw(c5348.79,10657.2) 5374.39,10682.81 ccw(c5400,10708.42) 5400,10672.2 ccw(c5400,10708.42) 5425.61,10682.81 ccw(c5451.21,10657.2) C1002.2@5415,10657.2 ; C1004.1@5486.61,10950 5486.61,10743.82 C1002.2@5400,10657.2 5088.31,10968.9 ; 5845.86,10094.14 cw(c5811.72,10060) v1@5860,10060 ; 5850,10132.43 ccw(c5942.43,10132.43) v1@5877.07,10067.07 ; v1(5870,10060) 5880,10060 5875,10065 5850,10090 5850,10851.01 5860,10861.01 5860,10918.99 5800,10978.99 5800,11005.15 5530.15,11275 5145,11275 ; C1007.2@4550.55,10657.2 J1001.S@4848.5,10359.25 ; C1007.2@4550.55,10657.2 4612.2,10657.2 4645,10690 4645,10925 C1009.1@4645,10930 ; C1009.1@4645,10930 U1003.2@4645,11140 4645,11205 4715,11275 5145,11275 ; J1003.S@4812.28,7981.14 J1003.S@4848.5,7981.14 ; J1002.S@4812.28,8866.14 J1002.S@4848.5,8866.14 ; J1001.S@4812.28,9741.14 J1001.S@4848.5,9741.14 ; J1004.S@4848.5,7724.25 J1003.S@4848.5,7981.14 ; J1003.S@4848.5,8599.25 J1002.S@4848.5,8866.14 ; J1002.S@4848.5,9484.25 J1001.S@4848.5,9741.14 ; 5088.31,10968.9 C1005.1@5088.31,11015 5100,11026.69 U1001.2@5100,11140 5100,11230 5145,11275
CAN_H: J1001.1 J1002.1 J1003.1 J1004.1 R1004.2 U1005.7 | length 6110.3
  Top Layer w15: v1(5265,8781) v1(5400,8781) ; v1@5277.37,8768.63 cw(c5307.25,8738.75) 5307.25,8781 cw(c5307.25,8823.25) v1@5277.37,8793.37 ; v1@5387.63,8768.63 ccw(c5357.75,8738.75) 5357.75,8781 ccw(c5357.75,8823.25) v1@5387.63,8793.37
  Bottom Layer w15: J1004.1@4978.43,7590 5023.79,7590 ; J1002.1@4978.43,9350 5023.79,9350 ; J1004.1@4982.88,7584.13 ccw(c5000.38,7603.19) 5018.68,7584.89 ; J1002.1@4982.88,9344.13 ccw(c5000.38,9363.19) 5018.68,9344.89 ; J1003.1@4982.96,8459.06 ccw(c5000.37,8478.54) 5018.85,8460.06 ; J1001.1@4983.37,10218.71 ccw(c5000.29,10240.45) 5019.76,10220.97 ; J1001.1@4992.58,10230.55 ccw(c5010.8,10253.96) 5031.78,10232.99 ; J1003.1@4992.95,8470.24 ccw(c5010.96,8490.39) 5030.07,8471.28 ; J1004.1@4993.02,7595.18 ccw(c5010.98,7614.73) 5029.75,7595.96 ; J1002.1@4993.02,9355.18 ccw(c5010.98,9374.73) 5029.75,9355.96 ; J1003.1@4998.43,8485 J1003.1@4978.43,8465 5023.79,8465 ; J1001.1@4998.43,10245 J1001.1@4978.43,10225 5023.79,10225 ; J1001.1@5001.79,10242.39 ccw(c5021.31,10267.48) 5043.79,10245 ; J1003.1@5002.95,8481.42 ccw(c5021.55,8502.24) 5041.29,8482.5 ; J1004.1@5003.17,7606.22 ccw(c5021.57,7626.27) 5040.82,7607.03 ; J1002.1@5003.17,9366.22 ccw(c5021.57,9386.27) 5040.82,9367.03 ; J1004.1@5008,7580.21 cw(c5023.79,7572.37) 5023.79,7590 ; J1004.1@5008,7599.79 ccw(c5023.79,7607.63) 5023.79,7590 ; J1003.1@5008,8455.21 cw(c5023.79,8447.37) 5023.79,8465 ; J1003.1@5008,8474.79 ccw(c5023.79,8482.63) 5023.79,8465 ; J1002.1@5008,9340.21 cw(c5023.79,9332.37) 5023.79,9350 ; J1002.1@5008,9359.79 ccw(c5023.79,9367.63) 5023.79,9350 ; J1001.1@5008,10215.21 cw(c5023.79,10207.37) 5023.79,10225 ; J1001.1@5008,10234.79 ccw(c5023.79,10242.63) 5023.79,10225 ; 5089.53,7607.03 5040.82,7607.03 ; 5089.53,7607.5 5327.5,7607.5 5382.5,7662.5 5382.5,8425.89 5325.89,8482.5 5041.29,8482.5 ; 5089.53,9367.03 5040.82,9367.03 ; 5089.53,9367.5 5380,9367.5 ; 5237.5,8485 5237.5,8575.89 5265,8603.39 v1@5265,8779 ; v1@5252.63,8768.63 cw(c5222.75,8738.75) 5265,8738.75 cw(c5307.25,8738.75) v1@5277.37,8768.63 ; 5382.5,8829.28 ccw(c5448.28,8829.28) v1@5401.77,8782.77 ; 5382.5,8865.5 ccw(c5484.5,8865.5) 5412.37,8793.37 ccw(c5442.25,8823.25) 5442.25,8781 ccw(c5442.25,8738.75) v1@5412.37,8768.63 ; R1004.2@5828.27,8755.52 ccw(c5797.39,8724.63) 5797.39,8768.31 ccw(c5797.39,8811.98) R1004.2@5828.27,8781.1 ; R1004.2@5845,8768.31 5561.69,8768.31 5549,8781 v1(5400,8781) 5382.5,8798.5 5382.5,10066.14 5203.64,10245 5043.79,10245 ; R1004.2@5860,8768.31 5933.48,8768.31 5951.79,8750 U1005.7@6010,8750 ; R1004.2@5861.73,8755.52 cw(c5892.61,8724.63) 5892.61,8768.31 cw(c5892.61,8811.98) R1004.2@5861.73,8781.1 ; 5023.79,7590 5040.82,7607.03 ; 5023.79,8465 5041.29,8482.5 ; 5023.79,9350 5040.82,9367.03 ; 5023.79,10225 5043.79,10245
CAN_L: J1001.2 J1002.2 J1003.2 J1004.2 R1004.1 U1005.6 | length 5473.8
  Top Layer w15: v1@5287.63,7557.37 ccw(c5257.75,7587.25) 5300,7587.25 ccw(c5342.25,7587.25) v1@5312.37,7557.37 ; v1@5287.63,7662.63 cw(c5257.75,7632.75) 5300,7632.75 cw(c5342.25,7632.75) v1@5312.37,7662.63 ; v1@5287.63,8432.37 ccw(c5257.75,8462.25) 5300,8462.25 ccw(c5342.25,8462.25) v1@5312.37,8432.37 ; v1@5287.63,8537.63 cw(c5257.75,8507.75) 5300,8507.75 cw(c5342.25,8507.75) v1@5312.37,8537.63 ; v1@5287.63,9317.37 ccw(c5257.75,9347.25) 5300,9347.25 ccw(c5342.25,9347.25) v1@5312.37,9317.37 ; v1@5287.63,9422.63 cw(c5257.75,9392.75) 5300,9392.75 cw(c5342.25,9392.75) v1@5312.37,9422.63 ; v1(5300,7545) v1(5300,7675) ; v1(5300,8420) v1(5300,8550) ; v1(5300,9305) v1(5300,9435)
  Bottom Layer w15: J1004.2@5078.43,7540 v1@5295,7540 ; J1003.2@5078.43,8415 v1@5295,8415 ; J1002.2@5078.43,9300 v1@5295,9300 ; J1001.2@5078.43,10175 5210,10175 5330,10055 5330,9455 ; J1004.2@5103.84,7524.42 cw(c5141.45,7486.82) 5141.45,7540 cw(c5141.45,7593.18) J1004.2@5103.84,7555.58 ; J1003.2@5103.84,8399.42 cw(c5141.45,8361.82) 5141.45,8415 cw(c5141.45,8468.18) J1003.2@5103.84,8430.58 ; J1002.2@5103.84,9284.42 cw(c5141.45,9246.82) 5141.45,9300 cw(c5141.45,9353.18) J1002.2@5103.84,9315.58 ; J1001.2@5103.84,10159.42 cw(c5141.45,10121.82) 5141.45,10175 cw(c5141.45,10228.18) J1001.2@5103.84,10190.58 ; 5245.68,7540 ccw(c5245.68,7599.32) v1@5287.63,7557.37 ; 5245.68,8415 ccw(c5245.68,8474.32) v1@5287.63,8432.37 ; 5245.68,9300 ccw(c5245.68,9359.32) v1@5287.63,9317.37 ; 5269.82,7540 cw(c5269.82,7514.82) v1@5287.63,7532.63 ; 5269.82,8415 cw(c5269.82,8389.82) v1@5287.63,8407.63 ; 5269.82,9300 cw(c5269.82,9274.82) v1@5287.63,9292.63 ; v1(5300,7675) 5310,7675 5330,7695 ; v1(5300,8550) 5310,8550 5330,8570 ; v1(5300,9435) 5310,9435 5330,9455 ; v1@5302.98,8402.76 cw(c5308.85,8368.85) 5333.18,8393.18 ; v1@5302.98,9287.76 cw(c5308.85,9253.85) 5333.18,9278.18 ; v1@5307.28,7690.91 ccw(c5315.7,7709.3) 5330,7695 ; v1@5307.28,8565.91 ccw(c5315.7,8584.3) 5330,8570 ; v1@5307.28,9450.91 ccw(c5315.7,9469.3) 5330,9455 ; v1@5317.5,7675 cw(c5335.61,7675) 5322.8,7687.8 ; v1@5317.5,8420 ccw(c5344.39,8420) 5325.38,8400.98 ; v1@5317.5,8550 cw(c5335.61,8550) 5322.8,8562.8 ; v1@5317.5,9305 ccw(c5344.39,9305) 5325.38,9285.98 ; v1@5317.5,9435 cw(c5335.61,9435) 5322.8,9447.8 ; 5321.36,8405 5330,8396.36 5330,7695 ; 5321.36,9290 5330,9281.36 5330,8570 ; 5336,8702 5409.39,8702 5427.39,8720 5760,8720 5798.31,8681.69 ; R1004.1@5828.08,8669.1 ccw(c5798.31,8640.22) 5798.31,8681.69 ; R1004.1@5828.08,8694.29 cw(c5798.31,8723.17) 5798.31,8681.69 ; R1004.1@5845,8681.69 5798.31,8681.69 ; R1004.1@5860,8681.69 5933.48,8681.69 5951.79,8700 U1005.6@6010,8700 ; R1004.1@5861.73,8668.9 cw(c5892.61,8638.02) 5892.61,8681.69 cw(c5892.61,8725.37) R1004.1@5861.73,8694.48